# EAGLE board Schematic revB (EAGLE 7.5.0)
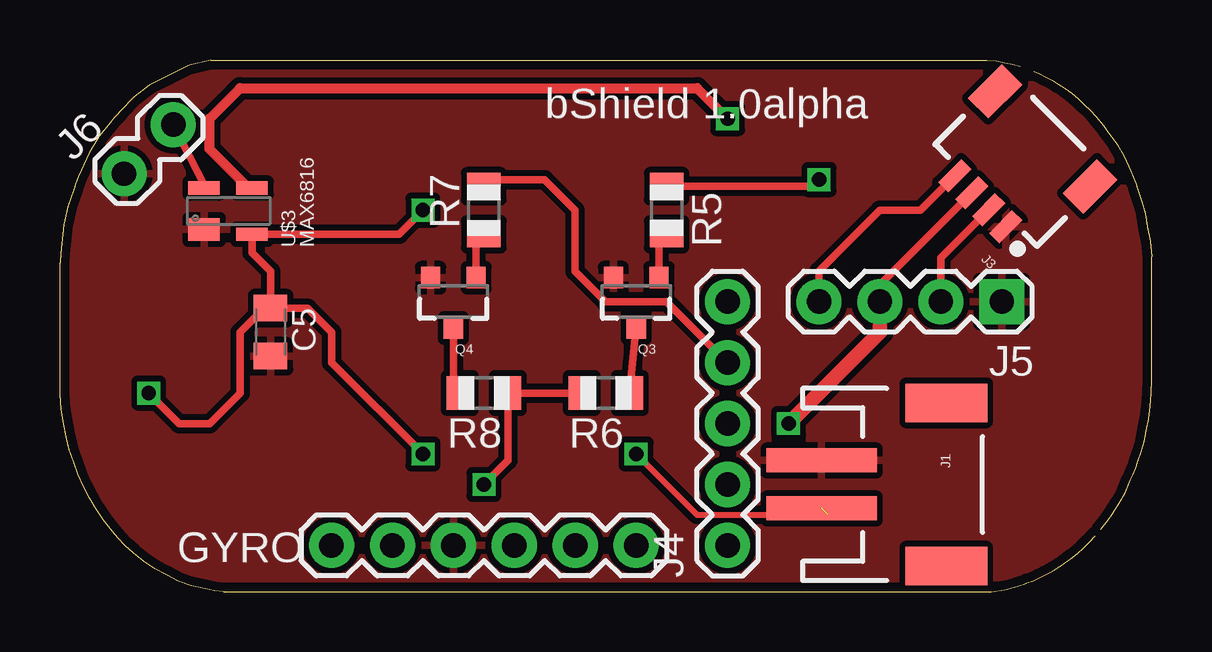
[diagram p0: board, top side]
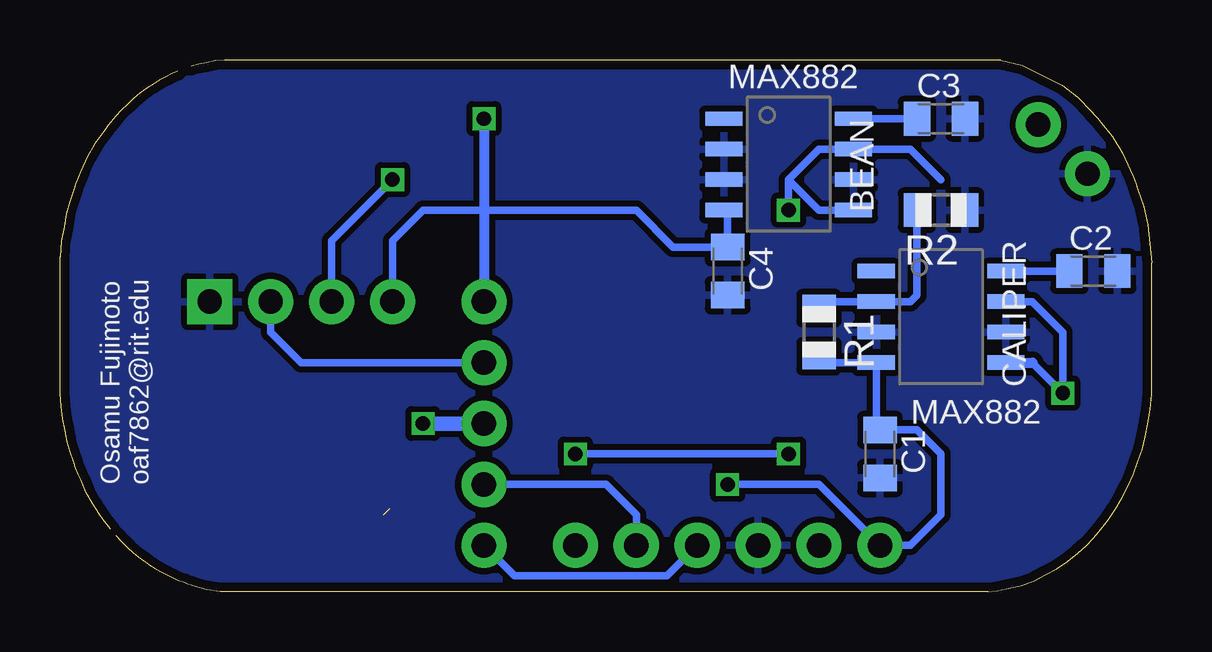
[diagram p1: board, bottom side, seen from below]

Size 45.5 x 22.15 mm. Coordinates in mm from the lower left corner, seen from the top.
Outline: 43.15,2.31 42.91,2.05 42.65,1.81 42.44,1.61 42.21,1.43 41.98,1.26 41.87,1.18 41.76,1.1 41.65,1.03 41.47,0.91 41.28,0.8 41.08,0.7 40.83,0.57 40.57,0.45 40.31,0.36 40.17,0.31 40.04,0.27 39.91,0.23 39.38,0.08 38.83,0 6.83,0 6.43,0.04 6.05,0.12 5.48,0.23 4.93,0.43 4.42,0.7 3.94,0.95 3.48,1.26 3.06,1.62 2.73,1.91 2.41,2.24 2.12,2.59 1.8,2.99 1.5,3.42 1.24,3.89 0.98,4.37 0.75,4.87 0.57,5.41 0.39,5.91 0.26,6.44 0.16,6.99 0.06,7.59 0,8.22 0,13.69 0.02,14.1 0.07,14.49 0.15,15.28 0.32,16.03 0.57,16.74 0.66,17.01 0.77,17.28 0.89,17.54 1.22,18.28 1.64,18.96 2.12,19.55 2.25,19.71 2.38,19.86 2.52,20 3.08,20.6 3.72,21.09 4.42,21.45 4.46,21.47 4.51,21.5 4.56,21.52 5.39,21.92 6.29,22.15 38.65,22.15 39.02,22.11 39.39,22.04 39.71,21.98 40.03,21.89
Outline: 43.38,2.59 43.54,2.79 43.69,2.99 43.84,3.21 44.14,3.65 44.4,4.12 44.62,4.63 44.74,4.88 44.84,5.14 44.93,5.41 45.07,5.82 45.19,6.25 45.28,6.69 45.39,7.2 45.45,7.72 45.48,8.25 45.49,8.45 45.5,8.66 45.5,13.94 45.44,14.59 45.33,15.2 45.24,15.73 45.1,16.25 44.93,16.74 44.84,17 44.74,17.26 44.63,17.51 44.36,18.11 44.04,18.66 43.68,19.17 43.58,19.3 43.48,19.43 43.38,19.55 43.17,19.81 42.94,20.06 42.71,20.28 42.44,20.53 42.17,20.76 41.88,20.96 41.62,21.15 41.36,21.31 41.08,21.45 40.84,21.58 40.59,21.69
Copper layers (1*16): Top 0.0356mm / dielectric 1.5011mm / Bottom 0.0356mm
Design rules "oshpark-2layer": minimum track width 6mil, minimum drill 13mil, track to track 6mil, track to pad 6mil, pad to pad 6mil, via to via 6mil, smd to smd 6mil, copper to edge 15mil, drill to drill 6mil, minimum pad ring 7mil, minimum via ring 7mil, stop-mask expansion 2.5mil, vias tented up to drill 0mil, thermal gap 10mil

## Footprints (pad centres in the part's own frame; a part is rotated, then mirrored left to right if it is on the bottom)
SOIC8 = smd 1.55 x 0.6: P$1 -2.7,2.54; P$2 -2.7,1.27; P$3 -2.7,0; P$4 -2.7,-1.27; P$5 2.7,-1.27; P$6 2.7,0; P$7 2.7,1.27; P$8 2.7,2.54
C0805K = smd 1.1 x 1.4: 1 -1,0; 2 1,0
1X06 = drill 1.016 pad 1.88: 1 0,0; 2 2.54,0; 3 5.08,0; 4 7.62,0; 5 10.16,0; 6 12.7,0
JST-2-SMD = smd 1 x 4.6: 1 -1,-3.7; 2 1,-3.7 | smd 1.6 x 3.4: NC1 -3.4,1.5; NC2 3.4,1.5
1X04-1MM-RA = smd 0.6 x 1.35: 1 -1.5,0; 2 -0.5,0; 3 0.5,0; 4 1.5,0 | smd 1.2 x 2: NC1 2.8,-3.675; NC2 -2.8,-3.675
1X05 = drill 1.016 pad 1.88: 1 0,0; 2 2.54,0; 3 5.08,0; 4 7.62,0; 5 10.16,0
1X04 = drill 1.016 pad 1.88 square: 1 0,0 | drill 1.016 pad 1.88: 2 2.54,0; 3 5.08,0; 4 7.62,0
1X02_LOCK = drill 1.016 pad 1.88: 1 -0.178,0; 2 2.718,0
SOT23-3 = smd 0.8 x 0.9: 1 -0.95,-1; 2 0.95,-1; 3 0,1.1
R0805 = smd 1.1 x 1.4: 1 -1,0; 2 1,0
SOT143 = smd 0.94 x 1.31: P$1 -0.805,1.5 | smd 0.55 x 1.31: P$2 0.92,1.5; P$3 0.92,-0.5; P$4 -1,-0.5

## Placement (x,y rotation side)
BEAN  MAX882  [SOIC8]  15.13,17.16 0 bottom
C1  2.2uF  [C0805K]  11.32,5.73 270 bottom
C2  1uF  [C0805K]  2.43,13.35 0 bottom
C3  1uF  [C0805K]  8.78,19.7 0 bottom
C4  2.2uF  [C0805K]  17.67,13.35 270 bottom
C5  1uF  [C0805K]  8.78,10.81 270 top
CALIPER  MAX882  [SOIC8]  8.78,10.81 0 bottom
GYRO  [1X06]  11.32,1.92 0 top
J1  [JST-2-SMD]  35.45,4.46 270 top
J3  [1X04-1MM-RA]  38.36,16.26 135 top
J4  [1X05]  27.83,1.92 90 top
J5  [1X04]  39.26,12.08 180 top
J6  [1X02_LOCK]  2.8,17.53 45 top
Q3  MMBT5088  [SOT23-3]  24.02,12.08 180 top
Q4  MMBT5088  [SOT23-3]  16.4,12.08 180 top
R1  10K  [R0805]  13.86,10.81 270 bottom
R2  10K  [R0805]  8.78,15.89 180 bottom
R5  10K  [R0805]  25.29,15.89 270 top
R6  10K  [R0805]  22.75,8.27 180 top
R7  10K  [R0805]  17.67,15.89 90 top
R8  10K  [R0805]  17.67,8.27 180 top
U$3  MAX6816  [SOT143]  7.51,15.89 90 top

## Library data of the parts
BEAN CALIPER U$3 = nuclearfish_rev2
C1-C5 R1 R2 R5-R8 = adafruit
GYRO = SparkFun-Connectors; PROD_ID: CONN-08437
J1 = SparkFun-Connectors; BTM_NEG: -; BTM_POS: +; PROD_ID: CONN-11443; TOP_NEG: -; TOP_POS: +
J3 J4 J6 = SparkFun-Connectors
J5 = SparkFun-Connectors; PROD_ID: CONN-09696
Q3 Q4 = SparkFun-DiscreteSemi; PROD_ID: TRANS-11160

## Nets
+3V3: C1.1 CALIPER.P$4 GYRO.1 R1.2 R6.2 R8.1
CLK: J3.3 J4.3 J5.3 R5.1
DB1: J4.5 U$3.P$3
G-CLK: GYRO.5 J4.2
G-SDA: GYRO.4 J4.1
GND: BEAN.P$2 BEAN.P$3 BEAN.P$6 C1.2 C2.2 C3.2 C4.2 C5.2 CALIPER.P$3 CALIPER.P$6 GYRO.3 J1.1 J3.1 J5.1 J6.1 Q3.2 Q4.2 R2.1 U$3.P$1
N$3: Q3.1 R5.2
N$4: Q3.3 R6.1
N$5: Q4.1 R7.1
N$6: Q4.3 R8.2
N$8: BEAN.P$8 C3.1
N$9: C2.1 CALIPER.P$8
N$11: CALIPER.P$2 R1.1 R2.2
N$12: J6.2 U$3.P$2
SDA: J3.2 J4.4 J5.2 R7.2
V+: BEAN.P$4 C4.1 J3.4 J5.4
VIN: BEAN.P$5 BEAN.P$7 C5.1 CALIPER.P$5 CALIPER.P$7 J1.2 U$3.P$4

## Tracks (layer width: path | path; a pad name or v marks a point on that pad's centre or on a via)
+3V3  (via drill 0.6 pad 0.3)
  Top 0.305: R6.2 R8.1 18.67,5.46 v17.67,4.46
  Bottom 0.305: R1.2 13.86,9.54 CALIPER.P$4 11.48,6.89 C1.1 9.78,6.73 8.78,5.73 8.78,3.19 10.05,1.92 GYRO.1 13.86,4.46 v17.67,4.46
CLK  (via drill 0.6, 0.6 pad 0.3)
  Top 0.305: R5.1 31.37,16.89 v31.64,17.16 | J3.3 34.18,12.79 J5.3
  Top 0.61: v30.37,7 34.18,10.81 J5.3
  Bottom 0.305: v31.64,17.16 34.18,14.62 J5.3
  Bottom 0.61: J4.3 v30.37,7
DB1  (via drill 0.6)
  Top 0.406: U$3.P$3 7.86,16.81 6.24,18.43 6.24,19.7 7.51,20.97 26.56,20.97 v27.83,19.7
  Bottom 0.406: v27.83,19.7 J4.5
G-CLK
  Bottom 0.305: GYRO.5 21.48,3.19 22.75,4.46 J4.2
G-SDA
  Bottom 0.305: GYRO.4 20.21,0.65 26.56,0.65 J4.1
GND
  pour Bottom (isolate 0.254): 6.24,22.24 39.26,22.24 40.53,22.24 arc-90 45.61,17.16 45.61,5.73 arc-90 39.26,-0.62 7.51,-0.62 arc-90 -0.11,7 -0.11,15.89 arc-90
  pour Top (isolate 0.254): 4.97,22.24 37.99,22.24 arc-90 45.61,14.62 45.61,7 arc-90 37.99,-0.62 8.78,-0.62 arc-90 -0.11,8.27 -0.11,17.16 arc-90
N$3
  Top 0.305: Q3.1 24.97,14.57 R5.2
N$4
  Top 0.305: Q3.3 R6.1
N$5
  Top 0.305: Q4.1 17.35,14.57 R7.1
N$6
  Top 0.305: Q4.3 16.4,8.54 R8.2
N$8
  Bottom 0.305: C3.1 BEAN.P$8
N$9
  Bottom 0.305: C2.1 CALIPER.P$8
N$11
  Bottom 0.305: R2.2 9.78,12.35 10.05,12.08 CALIPER.P$2 13.59,12.08 R1.1
N$12
  Top 0.305: J6.2 6.06,16.86 U$3.P$2
SDA
  Top 0.305: J3.2 36.72,13.91 J5.2 | R7.2 17.94,17.16 20.21,17.16 21.48,15.89 21.48,13.35 22.75,12.08 25.29,12.08 J4.4
  Bottom 0.305: J4.4 35.45,9.54 36.72,10.81 J5.2
V+
  Top 0.305: J5.4 31.64,13.35 34.18,15.89 35.87,15.89 J3.4
  Bottom 0.305: BEAN.P$4 17.67,15.73 C4.1 19.94,14.35 21.48,15.89 30.37,15.89 31.64,14.62 J5.4
VIN  (via drill 0.6 pad 0.3)  (1 unrouted)
  Top 0.254: v24.02,5.73 26.56,3.19 32.02,3.19 32.91,3.19
  Top 0.305: C5.1 8.78,13.35 8.01,14.12 U$3.P$4 14.13,14.89 v15.13,15.89 | C5.1 10.32,11.81 11.32,10.81 11.32,9.54 v15.13,5.73 | C5.1 8.51,11.81 7.51,10.81 7.51,8.27 6.24,7 4.97,7 v3.7,8.27 | J1.2 31.37,3.46
  Bottom 0.305: 8.78,17.16 10.05,18.43 BEAN.P$7 13.86,18.43 15.13,17.16 | v15.13,5.73 v24.02,5.73 | BEAN.P$5 13.86,15.89 15.13,17.16 | CALIPER.P$7 4.97,12.08 3.7,10.81 v3.7,8.27 4.97,9.54 | v15.13,15.89 15.13,17.16
  Bottom 0.406: CALIPER.P$5 4.97,9.54

## Text on the board
tPlace: bShield 1.0alpha
bPlace: Osamu Fujimoto / oaf7862@rit.edu